# Altium PCB Final decision V3.PcbDoc (part 2 of 2)
Units mm, origin at the board's own origin, x right, y up, seen from the top; angles counter-clockwise.
Board outline 102.3 x 84 mm, 2 copper layers (Top Layer, Bottom Layer); 138 components, 123 nets, 552 pads, 289 vias.
Unrouted connection lines stored in the file: 2.
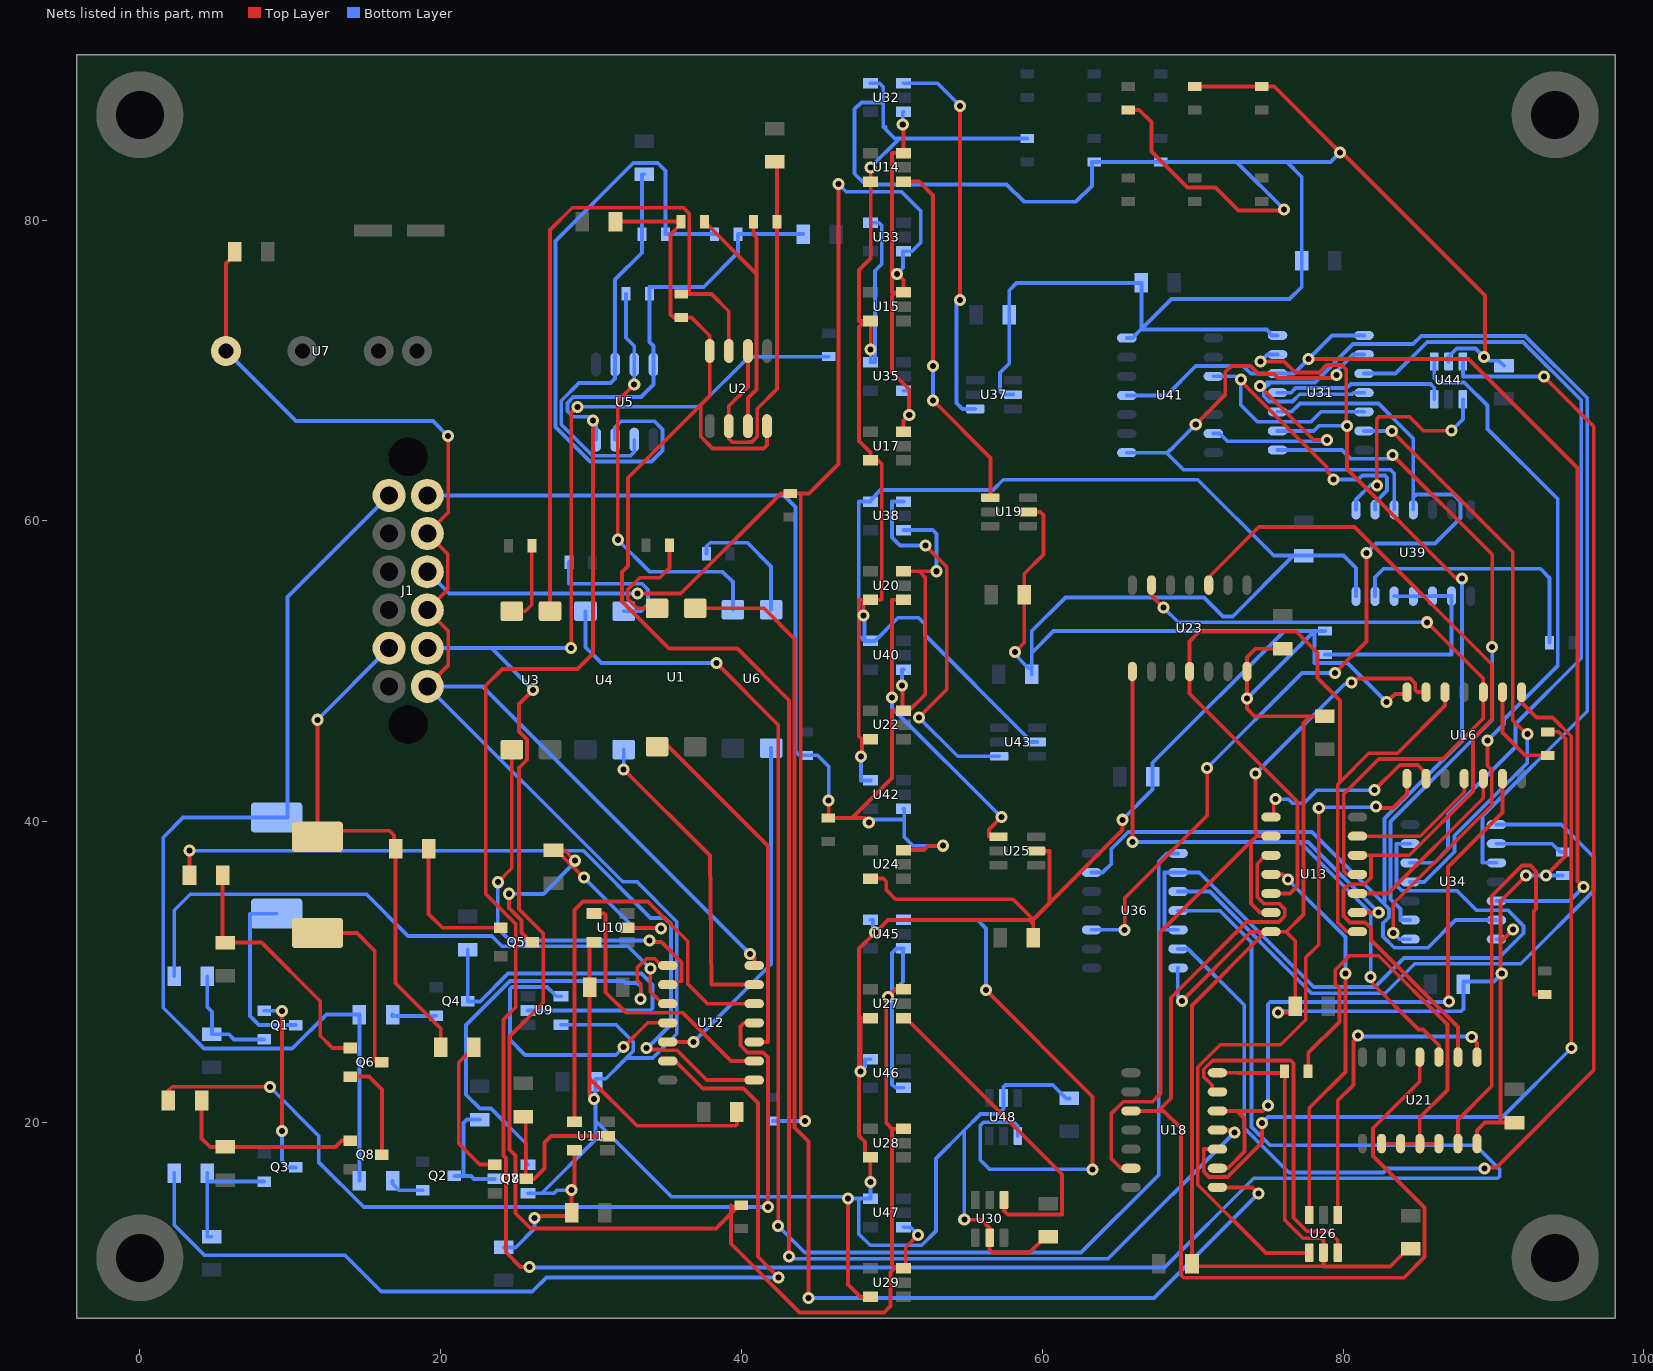
[diagram p2: the nets of this part, all layers, seen from the top]

## Via types
v1: diameter 0.8, hole 0.4, Top Layer to Bottom Layer, tented both sides, 289 vias

## Nets (pads, with @x,y where several pads share a name; then routed paths per layer and width w, separated by ;. In a path a pad name is that pad's centre, name@x,y a point inside that pad or via, vN(x,y) a via of type N, cw(c..) or ccw(c..) an arc to the next point about the centre after c; other vN are vias at no path point) (continued)
GREEN_1: U1.3 U12.10 | length 24
  Top Layer w0.254: U1.3@34.386,44.993 35.154,44.993 41.758,38.389 41.758,25.36 U12.10@40.85,25.36
GREEN_2: U4.3 U12.13 | length 20.8
  Top Layer w0.254: v1(32.17,43.485) 37.897,37.758 38.013,29.17 U12.13@40.85,29.17
  Bottom Layer w0.254: v1(32.17,43.485) U4.3@32.17,44.8
GREEN_LED_1: R22.2 U12.8 | length 52.6
  Top Layer w0.254: R22.2@3.298,36.452 v1(3.298,38.075) ; v1(33.7,24.952) 33.804,24.848 34.46,24.848 34.5,24.808 35.706,24.808 37.694,22.82 U12.8@40.85,22.82
  Bottom Layer w0.254: v1(3.298,38.075) 29.489,38.075 33.96,33.604 34.892,33.604 35.306,33.19 35.306,26.517 33.741,24.952 v1(33.7,24.952)
GREEN_LED_2: R25.2 U12.11 | length 59.3
  Top Layer w0.254: R25.2@1.901,21.466 1.901,22.123 2.155,22.377 v1(8.636,22.377) ; U12.11@40.85,26.63 40.179,26.63 39.94,26.391 39.94,25.135 40.411,24.663 41.427,24.663 41.758,24.333 v1(41.758,14.376)
  Bottom Layer w0.254: v1(8.636,22.377) 11.887,19.126 11.887,17.374 14.884,14.376 v1(41.758,14.376)
Green_On1_Reciever1: U13.4 U16.10 U23.6 | length 45.2
  Top Layer w0.254: U23.6@67.26,55.738 67.26,55.041 v1(68.047,54.254) ; U13.4@80.958,36.499 80.264,36.499 80.048,36.715 80.048,41.848 82.371,44.171 86.632,44.171 89.325,46.863 U16.10@89.325,48.617 89.325,49.53 v1(85.591,53.264)
  Bottom Layer w0.254: v1(68.047,54.254) 69.037,53.264 v1(85.591,53.264)
Green_On1_Reciever2: U31.4 U34.10 U41.6 | length 81.4
  Top Layer w0.254: v1(74.473,68.961) 78.054,65.38 v1(78.918,65.38)
  Bottom Layer w0.254: U41.6@71.374,65.809 71.806,65.809 72.315,65.3 78.838,65.3 v1(78.918,65.38) ; v1(74.473,68.961) 74.676,68.961 74.93,69.215 75.184,69.215 ; U31.4@81.395,68.527 80.696,68.527 80.596,68.428 77.115,68.428 76.633,67.945 75.082,67.945 74.727,68.301 74.727,68.758 75.184,69.215 ; U34.10@90.2,37.27 89.281,37.27 89.281,40.386 96.241,47.346 96.241,68.165 92.105,72.3 85.2,72.3 84.655,71.755 80.67,71.755 78.13,69.215 75.184,69.215
Green_On2_Reciever1: U13.1 U13.12 U16.12 U23.11 | length 60.7
  Top Layer w0.254: U13.12@75.208,35.229 76.478,35.229 76.981,35.732 76.981,41.33 69.8,48.511 U23.11@69.8,49.988 69.8,51.994 70.435,52.629 76.911,52.629 78.308,51.232 78.308,49.555 79.8,48.064 79.8,42.628 ; U13.1@80.958,32.689 80.264,32.689 79.651,33.302 79.651,42.477 79.8,42.628 ; U16.12@86.785,48.617 86.785,47.727 83.61,44.552 81.704,44.552 79.8,42.628
Green_On2_Reciever2: U31.1 U31.12 U34.12 U41.11 | length 72.9
  Top Layer w0.254: v1(77.699,70.764) 88.336,70.764 95.58,63.52 95.58,36.068 v1(95.987,35.662)
  Bottom Layer w0.254: U41.11@65.624,68.349 68.25,68.349 70.208,70.307 73.357,70.307 73.867,69.797 U31.12@75.645,69.797 76.731,69.797 v1(77.699,70.764) 79.271,72.337 U31.1@81.395,72.337 ; U34.12@90.2,34.73 95.055,34.73 v1(95.987,35.662)
Green_On3_Reciever1: U13.9 U13.13 U16.13 U18.6 | length 53.7
  Top Layer w0.254: U18.6@65.9,16.96 65.227,16.96 64.592,17.595 64.592,20.599 65.38,21.387 67.335,21.387 67.869,21.92 67.869,32.664 73.889,38.684 ; v1(74.168,43.205) 74.168,39.242 74.371,39.039 ; U13.13@75.208,33.959 74.486,33.959 73.889,34.557 73.889,38.684 ; U13.9@75.208,39.039 74.371,39.039 ; v1(80.548,49.248) 80.696,49.248 80.967,49.519 84.474,49.519 84.797,49.196 84.797,48.766 84.946,48.617 U16.13@85.515,48.617 ; 73.889,38.684 74.244,39.039 74.371,39.039
  Bottom Layer w0.254: v1(74.168,43.205) 80.106,49.143 80.443,49.143 v1(80.548,49.248)
Green_On3_Reciever2: U31.9 U31.13 U34.13 U36.6 | length 87.7
  Top Layer w0.254: v1(74.524,70.612) 76.081,70.612 76.818,69.875 78.418,69.875 78.906,70.363 79.929,70.363 80.213,70.079 80.213,66.372 v1(80.26,66.326) 80.26,63.453 87.554,56.159 v1(87.909,56.159)
  Bottom Layer w0.254: U36.6@63.282,36.627 64.008,36.627 64.592,37.211 64.592,38.202 65.716,39.326 77.94,39.326 82.753,34.513 ; v1(74.524,70.612) 74.979,71.067 U31.13@75.645,71.067 ; U31.9@75.645,65.987 78.053,65.987 78.392,66.326 v1(80.26,66.326) ; v1(87.909,56.159) 87.909,45.364 82.753,40.208 82.753,34.513 ; U34.13@90.2,33.46 87.486,33.46 85.649,31.623 83.401,31.623 82.652,32.372 82.652,33.248 83.058,33.655 83.058,34.208 82.753,34.513
GREEN_SIGNAL_Primary: U1.1 U18.8 | length 87.4
  Top Layer w0.254: U1.1@36.926,54.193 41.504,54.193 43.536,52.161 43.536,19.66 44.45,18.745 v1(44.45,8.331) ; U18.8@71.65,15.69 73.965,15.69 v1(74.371,15.284)
  Bottom Layer w0.254: v1(44.45,8.331) 67.419,8.331 v1(74.371,15.284)
GREEN_SIGNAL_Secondary: U4.1 U36.8 | length 101.2
  Top Layer w0.254: v1(38.329,50.546) 42.443,46.431 v1(42.443,13.115)
  Bottom Layer w0.254: U4.1@29.63,54 29.63,51.599 30.683,50.546 v1(38.329,50.546) ; v1(42.443,13.115) 44.208,11.35 62.572,11.35 67.742,16.519 67.742,37.363 68.275,37.897 U36.8@69.032,37.897
LED_GREEN: D2.1 J1.11 R20.2 R24.2 | length 35.3
  Top Layer w0.254: v1(11.811,46.781) 11.811,39.1 11.811,39 D2.1@11.8,39 12.2,39.4 16.6,39.4 16.9,39.1 16.9,38.3 R20.2@17,38.2 17,29.264 20,26.264 R24.2@20,25
  Bottom Layer w0.254: v1(11.811,46.781) J1.11@16.572,51.542
LED_RED: D1.1 J1.7 R13.2 R17.2 | length 70.5
  Bottom Layer w0.254: R13.2@14.601,16.132 R17.2@14.601,27.181 12.398,27.181 10.135,24.917 4.267,24.917 1.549,27.635 1.549,38.964 2.873,40.287 D1.1@9.097,40.287 9.804,40.287 9.804,54.934 J1.7@16.572,61.702
NetC1_1: C1.1 R2.2 U2.2 U2.6 | length 27.4
  Top Layer w0.254: U2.2@40.429,71.303 40.429,68.91 39.159,67.64 U2.6@39.159,66.303 39.159,65.489 39.413,65.235 40.495,65.235 40.513,65.253 40.691,65.253 41.046,65.608 41.046,67.462 42.352,68.768 R2.2@42.352,79.892 42.352,83.872 C1.1@42.207,83.872
NetC3_1: C3.1 R7.2 U5.2 U5.6 | length 26.9
  Bottom Layer w0.254: U5.6@32.87,65.4 32.87,64.592 32.616,64.338 30.091,64.338 28.016,66.413 28.016,67.996 29.187,69.167 31.298,69.167 31.6,69.469 U5.2@31.6,70.4 31.6,76.048 33.383,77.831 R7.2@33.383,79.074 33.383,83.054 C3.1@33.528,83.054
NetD1_2: D1.2 Q1.3 | length 11.9
  Bottom Layer w0.254: D1.2@9.097,33.887 7.315,33.887 7.315,27.09 7.925,26.48 Q1.3@10.367,26.48
NetD2_2: D2.2 Q6.3 | length 12.2
  Top Layer w0.254: D2.2@11.8,32.6 14.427,32.6 15.618,31.409 15.618,24.006 Q6.3@16.082,24.006
NetQ1_1: Q1.1 R12.1 R14.2 | length 7.6
  Bottom Layer w0.254: R12.1@4.482,29.721 4.482,27.686 4.801,27.367 R14.2@4.801,25.868 ; R14.2@4.779,25.868 R14.2@4.801,25.868 ; Q1.1@8.267,25.53 6.256,25.53 5.918,25.868 R14.2@4.801,25.868
NetQ1_2: Q1.2 Q3.3 | length 12.3
  Top Layer w0.254: v1(9.449,19.431) v1(9.449,27.43)
  Bottom Layer w0.254: Q1.2@8.267,27.43 v1(9.449,27.43) ; v1(9.449,19.431) 9.449,17.45 9.878,17.021 Q3.3@10.367,17.021
NetQ2_1: Q2.1 R13.1 | length 2.4
  Bottom Layer w0.254: R13.1@16.801,16.132 16.801,15.926 17.227,15.5 Q2.1@18.8,15.5
NetQ2_3: Q2.3 R11.1 U8.2 | length 7.5
  Bottom Layer w0.254: Q2.3@20.9,16.45 21.514,16.45 ; R11.1@22.6,20.2 21.742,20.2 21.514,19.971 21.514,16.45 ; U8.2@23.6,16.25 22.225,16.25 22.025,16.45 21.514,16.45
NetQ3_1: Q3.1 R16.1 R18.2 | length 8.3
  Bottom Layer w0.254: R16.1@4.482,16.64 R16.1@4.482,16.071 ; R18.2@4.779,12.406 4.482,12.406 R16.1@4.482,16.071 ; Q3.1@8.267,16.071 R16.1@4.482,16.071
NetQ4_1: Q4.1 R17.1 | length 3
  Bottom Layer w0.254: R17.1@16.801,27.181 16.801,27.076 19.585,27.076 19.609,27.1 Q4.1@19.7,27.1
NetQ4_3: Q4.3 R15.1 U9.2 | length 26.7
  Bottom Layer w0.254: R15.1@21.8,31.5 Q4.3@21.8,28.05 22.631,28.05 24.485,29.904 33.345,29.904 34.087,29.162 34.087,27.602 33.934,27.45 U9.2@25.8,27.45
NetQ5_1: Q5.1 R20.1 | length 9.5
  Top Layer w0.254: R20.1@19.2,38.2 19.2,33.867 20.117,32.95 Q5.1@24,32.95
NetQ5_3: Q5.3 R19.1 U10.2 | length 22.3
  Top Layer w0.254: v1(24.548,35.213) 24.548,34.258 25.373,33.434 25.373,32.627 26,32 Q5.3@26.1,32 ; R19.1@27.5,38.1 R19.1@27.711,38.1 ; v1(28.938,37.407) 28.245,38.1 R19.1@27.711,38.1 ; v1(29.533,36.278) R19.1@27.711,38.1 ; U10.2@32.4,32.95 34.601,32.95 v1(34.637,32.914)
  Bottom Layer w0.254: v1(24.548,35.213) 25.444,35.213 25.456,35.2 26.826,35.2 28.938,37.312 v1(28.938,37.407) ; v1(29.533,36.278) 32.897,32.914 v1(34.637,32.914)
NetQ6_1: Q6.1 R22.1 R23.2 | length 17.2
  Top Layer w0.254: R22.1@5.498,36.452 5.498,31.964 R23.2@5.668,31.964 8.092,31.964 11.989,28.067 11.989,25.769 12.802,24.956 Q6.1@13.982,24.956
NetQ6_2: Q6.2 Q8.3 | length 6.8
  Top Layer w0.254: Q6.2@13.982,23.056 15.24,23.056 16.104,22.192 16.104,17.849 Q8.3@16.082,17.849
NetQ7_1: Q7.1 R24.1 | length 9.8
  Top Layer w0.254: R24.1@22.2,25 21.2,24 21.2,18.6 22.6,17.2 Q7.1@23.6,17.2
NetQ7_3: Q7.3 R21.1 U11.2 | length 11.9
  Top Layer w0.254: R21.1@25.5,20.4 25.654,20.4 25.654,16.25 Q7.3@25.7,16.25 26.213,16.25 26.899,16.936 26.899,18.669 27.33,19.1 U11.2@31.1,19.1
NetQ8_1: Q8.1 R25.1 R26.2 | length 12.8
  Top Layer w0.254: R25.1@4.101,21.466 4.101,18.948 4.674,18.375 R26.2@5.668,18.375 13.013,18.375 13.437,18.799 Q8.1@13.982,18.799
NetR1_2: R1.2 U1.2 | length 7.7
  Top Layer w0.254: U1.2@34.386,54.193 33.056,54.193 32.436,54.813 32.436,55.431 33.232,56.227 34.571,56.227 35.214,56.871 R1.2@35.214,58.383
NetR2_1: R2.1 R4.2 U2.7 | length 18.9
  Top Layer w0.254: R4.2@37.526,79.892 37.526,79.908 41.008,76.427 ; U2.7@40.429,66.303 40.429,68.166 41.008,68.744 41.008,76.427 ; R2.1@40.792,79.892 40.792,79.045 41.008,78.83 41.008,76.427
NetR3_2: R3.2 U3.2 | length 5.4
  Top Layer w0.254: U3.2@24.73,54 25.628,54 26.06,54.432 R3.2@26.06,58.337
NetR6_2: R6.2 U4.2 | length 9.6
  Bottom Layer w0.254: R6.2@28.521,57.265 28.521,55.821 33.382,55.821 33.782,55.421 33.782,54.458 33.324,54 U4.2@32.17,54
NetR7_1: R7.1 R9.2 U5.7 | length 43.6
  Bottom Layer w0.254: U5.7@31.6,65.4 31.6,66.218 32.006,66.624 34.211,66.624 34.747,66.088 34.747,64.694 34.011,63.957 29.929,63.957 27.635,66.251 27.635,78.625 32.805,83.795 34.435,83.795 34.943,83.287 R7.1@34.943,79.074 34.943,79.07 38.209,79.07 R9.2@38.209,79.074
NetR8_2: R8.2 U6.2 | length 8.4
  Bottom Layer w0.254: R8.2@37.675,57.819 37.675,58.3 37.922,58.547 40.395,58.547 41.97,56.972 U6.2@41.97,54.1
NetR34_1: R34.1 U16.9 | length 6.3
  Top Layer w0.254: U16.9@90.595,48.617 90.595,45.929 92.104,44.42 R34.1@93.6,44.42
NetR35_2: R35.2 U21.9 U21.10 U21.11 U21.12 | length 30
  Top Layer w0.254: R35.2@77.68,23.4 77.68,24.613 79.756,26.689 79.756,28.905 79.477,29.185 79.477,30.134 80.432,31.09 82.374,31.09 86.944,26.52 86.944,22.174 85.1,20.33 U21.11@85.1,18.6 U21.11@85.1,18.593 ; U21.9@82.56,18.6 82.56,18.593 U21.10@83.83,18.593 ; U21.10@83.83,18.6 U21.10@83.83,18.593 ; U21.12@86.37,18.6 86.37,18.593 U21.11@85.1,18.593 ; U21.10@83.83,18.593 U21.11@85.1,18.593
NetR37_1: R37.1 U21.13 | length 30.3
  Top Layer w0.254: U21.13@87.64,18.6 87.64,20.168 89.891,22.418 89.891,35.07 91.905,37.084 92.456,37.084 92.837,36.703 92.837,34.214 92.685,34.061 92.685,28.52 R37.1@93.4,28.52
NetR46_1: R46.1 U34.9 | length 4.6
  Bottom Layer w0.254: U34.9@90.2,38.54 93.903,38.54 94.463,37.98 R46.1@94.6,37.98
NetR47_2: R47.2 U39.9 U39.10 U39.11 U39.12 | length 16.2
  Bottom Layer w0.254: R47.2@78.8,51.12 87.21,51.12 U39.9@87.21,55 87.21,55.016 85.94,55.016 U39.10@85.94,55 85.94,54.991 U39.11@84.67,54.991 ; U39.12@83.4,55 83.4,54.991 U39.11@84.67,54.991 ; U39.11@84.67,55 U39.11@84.67,54.991
NetR49_1: R49.1 U39.13 | length 17.6
  Bottom Layer w0.254: U39.13@82.13,55 82.13,56.259 82.691,56.82 93.116,56.82 93.72,56.216 R49.1@93.72,51.9
NetU8_4: U8.4 U12.1 | length 30
  Top Layer w0.254: v1(33.3,28.2) 33.3,29.21 33.075,29.435 33.075,30.297 33.666,30.888 34.234,30.888 34.682,30.44 U12.1@35.1,30.44
  Bottom Layer w0.254: U8.4@25.8,17.2 25.654,17.2 25.654,18.618 23.343,20.93 22.606,20.93 21.692,21.844 21.692,26.486 24.619,29.413 32.167,29.413 32.294,29.286 33.041,29.286 33.3,29.027 v1(33.3,28.2)
NetU9_4: U9.4 U12.4 | length 18.9
  Top Layer w0.254: v1(32.156,25.019) 33.767,26.63 U12.4@35.1,26.63
  Bottom Layer w0.254: U9.4@28,28.4 27.686,28.4 27.079,29.007 24.749,29.007 24.6,28.858 24.6,25.5 25.6,24.5 31.637,24.5 v1(32.156,25.019)
NetU10_4: U10.4 U12.9 | length 17.7
  Top Layer w0.254: U10.4@30.2,33.9 30.861,33.9 30.963,33.798 30.963,28.662 32.32,27.305 36.079,27.305 39.294,24.09 U12.9@40.85,24.09
NetU11_4: U11.4 U12.12 | length 30.8
  Top Layer w0.254: U11.4@28.9,20.05 28.9,34.142 29.464,34.706 33.772,34.706 36.424,32.055 36.424,29.21 37.734,27.9 U12.12@40.85,27.9
NetU13_3: U13.3 U16.5 | length 12.3
  Top Layer w0.254: U13.3@80.958,35.229 82.989,35.229 89.325,41.565 U16.5@89.325,42.867
NetU13_6: U13.6 U16.4 | length 9.2
  Top Layer w0.254: U13.6@80.958,39.039 85.133,39.039 88.055,41.961 U16.4@88.055,42.867
NetU13_8: U13.8 U16.2 | length 13.1
  Top Layer w0.254: U13.8@75.208,40.309 75.236,40.309 75.396,40.469 75.396,41.396 v1(75.5,41.5) ; v1(82.1,42.1) 83.769,43.769 84.963,43.769 85.515,43.217 U16.2@85.515,42.867
  Bottom Layer w0.254: v1(75.5,41.5) 76.378,41.5 76.654,41.224 77.384,41.224 78.26,42.1 v1(82.1,42.1)
NetU13_11: U13.11 U26.3 | length 26.2
  Top Layer w0.254: U13.11@75.208,36.499 75.997,36.499 v1(76.327,36.17) ; U26.3@77.75,13.855 77.75,20.956 80.162,23.368 v1(80.162,29.896)
  Bottom Layer w0.254: v1(76.327,36.17) 80.162,32.334 v1(80.162,29.896)
NetU14_1: U14.1 U19.1 | length 24
  Top Layer w0.254: U14.1@50.769,82.564 51.816,82.564 52.73,81.65 v1(52.73,70.307) ; v1(52.73,68.021) 56.566,64.186 56.566,61.55 U19.1@56.545,61.55
  Bottom Layer w0.254: v1(52.73,68.021) v1(52.73,70.307)
NetU16_1: U16.1 U26.4 | length 47.4
  Top Layer w0.254: U26.4@77.75,11.345 77.75,11.328 74.88,11.328 70.343,15.865 70.343,23.681 71.834,25.171 75.858,25.171 77.521,26.834 77.521,30.963 78.384,31.826 v1(78.384,40.919) ; v1(82.2,41) 82.281,40.919 83.33,40.919 84.245,41.834 U16.1@84.245,42.867
  Bottom Layer w0.254: v1(78.384,40.919) 78.425,40.96 82.16,40.96 v1(82.2,41)
NetU16_6: U16.6 U18.9 U18.12 | length 43.9
  Top Layer w0.254: U18.9@71.65,16.96 72.339,16.96 73.457,18.078 73.457,20.266 72.953,20.77 ; U18.12@71.65,20.77 72.953,20.77 ; v1(75.006,21.126) 74.651,20.77 72.953,20.77 ; v1(87.058,28.058) 86.97,28.147 86.97,36.982 90.595,40.608 U16.6@90.595,42.867
  Bottom Layer w0.254: v1(75.006,21.126) 75.006,27.867 75.155,28.016 87.016,28.016 v1(87.058,28.058)
NetU16_8: U16.8 U18.10 | length 57
  Top Layer w0.254: U18.10@71.65,18.23 70.739,18.23 70.739,16.739 71.095,16.383 72.314,16.383 74.6,18.669 v1(74.6,19.964) ; U16.8@91.865,48.617 91.865,47.93 92.855,46.939 93.922,46.939 95.174,45.688 v1(95.174,24.943)
  Bottom Layer w0.254: v1(74.6,19.964) 75.006,20.371 90.602,20.371 v1(95.174,24.943)
NetU18_13: U18.13 U26.6 | length 23
  Top Layer w0.254: U18.13@71.65,22.04 71.298,22.04 71.298,22.479 70.741,23.036 70.741,23.539 71.332,24.13 76.517,24.13 76.708,23.939 76.708,13.665 77.597,12.776 79.045,12.776 79.65,12.171 U26.6@79.65,11.345
NetU20_1: U20.1 U25.1 | length 20.5
  Top Layer w0.254: v1(50.013,48.26) 50.013,54.756 U20.1@50.769,54.756 ; U25.1@57.09,39 56.453,39 56.453,39.486 v1(57.277,40.31)
  Bottom Layer w0.254: v1(50.013,48.26) 50.013,47.574 v1(57.277,40.31)
NetU21_1: U21.1 U26.1 | length 21.6
  Top Layer w0.254: U26.1@79.65,13.855 79.65,21.459 80.696,22.504 80.696,25.378 81,25.682 v1(81,25.8) ; v1(88.556,25.693) 88.556,25.646 88.91,25.292 U21.1@88.91,24.35
  Bottom Layer w0.254: v1(81,25.8) 81.086,25.714 88.535,25.714 v1(88.556,25.693)
NetU27_1: U27.1 U30.1 | length 22.2
  Top Layer w0.254: U27.1@50.769,26.947 50.927,26.947 61.316,16.559 61.316,13.894 57.709,13.894 57.45,14.153 U30.1@57.45,14.855
NetU31_3: U31.3 U34.5 | length 53.3
  Bottom Layer w0.254: U31.3@81.395,69.797 83.49,69.797 85.593,71.9 91.966,71.9 95.834,68.032 95.834,50.87 91.459,46.494 91.459,44.959 86.978,40.478 86.978,38.176 86.072,37.27 U34.5@84.45,37.27
NetU31_6: U31.6 U34.4 | length 39.4
  Top Layer w0.254: v1(83.238,65.987) 91.288,57.937 91.288,46.736 92.176,45.848 v1(92.252,45.848)
  Bottom Layer w0.254: U31.6@81.395,65.987 v1(83.238,65.987) ; U34.4@84.45,36 85.4,36 87.4,38 87.4,39.065 92.252,43.918 v1(92.252,45.848)
NetU31_8: U31.8 U34.2 | length 45.4
  Top Layer w0.254: v1(83.287,64.389) 89.916,57.76 v1(89.916,51.613)
  Bottom Layer w0.254: U31.8@75.645,64.717 79.936,64.717 80.518,64.135 83.033,64.135 v1(83.287,64.389) ; U34.2@84.45,33.46 83.82,33.46 83.82,34.188 83.16,34.849 83.16,40.005 89.916,46.761 v1(89.916,51.613)
NetU31_11: U31.11 U44.3 | length 11.5
  Bottom Layer w0.254: U31.11@75.645,68.527 76.532,68.527 76.839,68.834 80.239,68.834 80.518,69.113 85.813,69.113 86.067,68.859 U44.3@86.067,68.095
NetU32_1: U32.1 U37.1 | length 25.6
  Top Layer w0.254: v1(54.534,74.676) v1(54.534,87.605)
  Bottom Layer w0.254: U32.1@50.769,89.099 53.039,89.099 v1(54.534,87.605) ; v1(54.534,74.676) 54.305,74.447 54.305,67.831 54.686,67.45 U37.1@55.545,67.45
NetU34_1: U34.1 U44.4 | length 48.5
  Top Layer w0.254: v1(83.337,32.614) 83.337,34.544 89.891,41.097 89.891,43.432 89.6,43.723 v1(89.6,45.4)
  Bottom Layer w0.254: v1(83.337,32.614) 83.761,32.19 U34.1@84.45,32.19 ; U44.4@86.067,70.605 86.067,69.494 86.346,69.215 88.062,69.215 89.611,67.666 89.611,66.116 94.28,61.448 94.28,50.387 90.701,46.808 90.701,46.501 v1(89.6,45.4)
NetU34_6: U34.6 U36.9 U36.12 | length 46.9
  Bottom Layer w0.254: U36.12@69.032,32.817 68.146,32.817 68.123,32.84 68.123,36.627 U36.9@69.032,36.627 70.434,36.627 78.054,29.007 82.114,29.007 84.045,30.937 90.348,30.937 91.999,32.588 91.999,33.079 90.966,34.112 88.875,34.112 87.579,35.408 83.912,35.408 83.548,35.771 83.548,38.54 U34.6@84.45,38.54
NetU34_8: U34.8 U36.10 | length 42.8
  Bottom Layer w0.254: U36.10@69.032,35.357 71.143,35.357 77.9,28.6 82.808,28.6 84.762,30.554 91.81,30.554 96.643,35.387 96.643,37.673 94.505,39.81 U34.8@90.2,39.81
NetU36_13: U36.13 U44.6 | length 95.3
  Top Layer w0.254: v1(89.414,16.952) 89.48,17.018 90.195,17.018 96.672,23.495 96.672,66.269 v1(93.345,69.596)
  Bottom Layer w0.254: U36.13@69.032,31.547 69.698,31.547 73.431,27.813 73.431,19.634 76.387,16.679 82.69,16.679 82.963,16.952 v1(89.414,16.952) ; U44.6@87.967,70.605 87.967,69.596 v1(93.345,69.596)
NetU38_1: U38.1 U43.1 | length 24.8
  Top Layer w0.254: v1(51.791,46.939) 53.645,48.793 53.645,56.947 v1(52.222,58.369)
  Bottom Layer w0.254: U38.1@50.769,61.29 50.013,61.29 50.013,58.903 50.546,58.369 v1(52.222,58.369) ; v1(51.791,46.939) 54.38,44.35 U43.1@57.145,44.35
NetU39_1: U39.1 U44.1 | length 14.7
  Top Layer w0.254: v1(82.266,62.369) 82.245,62.39 82.245,66.78 82.394,66.929 84.409,66.929 85.338,66 v1(87.2,66)
  Bottom Layer w0.254: U39.1@80.86,60.75 80.86,61.429 81.839,62.408 82.227,62.408 v1(82.266,62.369) ; v1(87.2,66) 87.967,66.767 U44.1@87.967,68.095
NetU45_1: U45.1 U48.1 | length 38
  Top Layer w0.254: v1(56.261,28.804) 63.348,21.717 v1(63.348,16.891)
  Bottom Layer w0.254: U45.1@50.769,33.482 55.672,33.482 56.261,32.893 v1(56.261,28.804) ; U48.1@58.372,19.112 58.372,19.784 58.141,20.015 56.083,20.015 55.88,19.812 55.88,17.505 56.494,16.891 v1(63.348,16.891)
RED_1: U3.3 U12.2 | length 27.6
  Top Layer w0.254: v1(23.8,35.978) 24.73,36.908 U3.3@24.73,44.8 ; v1(33.9,32.1) 34.004,31.996 34.679,31.996 36.015,30.66 36.015,29.421 U12.2@35.1,29.17
  Bottom Layer w0.254: v1(23.8,35.978) 23.8,32.9 24.6,32.1 v1(33.9,32.1)
RED_2: U6.3 U12.5 | length 23.4
  Top Layer w0.254: U12.5@35.1,25.36 v1(36.805,25.36)
  Bottom Layer w0.254: v1(36.805,25.36) 41.97,30.525 U6.3@41.97,44.9
RED_Final_Primary: C2.2 R4.1 R5.1 U2.4 U2.8 U18.11 | length 127.4
  Top Layer w0.254: C2.2@31.623,79.892 31.623,79.908 35.966,79.908 R4.1@35.966,79.892 35.966,79.731 35.281,79.045 35.281,73.736 35.497,73.52 R5.1@36,73.52 36.683,73.52 37.889,72.314 U2.4@37.889,71.303 37.889,70.249 37.889,68.301 37.287,67.699 ; U2.8@41.699,66.303 41.699,65.043 41.477,64.821 38.075,64.821 37.287,65.609 37.287,67.699 ; v1(43.155,11.1) 43.155,48.082 39.726,51.511 35.191,51.511 32.055,54.648 32.055,56.596 32.461,57.002 32.461,62.873 37.287,67.699 ; U18.11@71.65,19.5 72.612,19.5 v1(72.771,19.341)
  Bottom Layer w0.254: v1(43.155,11.1) 43.307,10.947 64.378,10.947 v1(72.771,19.341)
RED_Final_Secondary: C4.2 R9.1 R10.1 U5.4 U5.8 U36.11 | length 197
  Top Layer w0.254: v1(25.9,10.4) 25.896,10.404 25.308,10.404 24.333,11.379 24.333,17.653 24.181,17.805 24.181,26.848 24.994,27.661 24.994,33.206 23,35.2 23,49.06 24.105,50.165 29.108,50.165 30.124,51.181 v1(30.124,66.675)
  Bottom Layer w0.254: v1(25.9,10.4) 25.937,10.363 68.123,10.363 74.06,16.3 90.275,16.3 90.424,16.449 90.424,16.864 88.797,18.491 75.133,18.491 73.914,19.71 73.914,31.986 71.813,34.087 U36.11@69.032,34.087 ; v1(30.124,66.675) 30.33,66.469 v1@30.33,66.454 ; U5.8@30.33,65.4 v1@30.33,66.454 ; R9.1@39.769,79.074 R9.1@39.769,79.07 ; C4.2@44.112,79.074 44.112,79.07 R9.1@39.769,79.07 ; v1@30.33,66.454 29.855,66.929 28.804,66.929 28.423,67.31 28.423,67.854 28.818,68.25 33.327,68.25 34.14,69.063 U5.4@34.14,70.4 34.14,71.628 33.88,71.888 R10.1@33.88,75.1 33.88,75.565 37.49,75.565 39.769,77.844 R9.1@39.769,79.07
RED_LED_1: R12.2 U12.3 | length 41.6
  Top Layer w0.254: v1(33.936,30.236) 33.936,28.714 34.75,27.9 U12.3@35.1,27.9
  Bottom Layer w0.254: R12.2@2.282,29.721 2.282,34.112 3.349,35.179 15.062,35.179 17.831,32.41 23.393,32.41 24.083,31.721 32.45,31.721 v1(33.936,30.236)
RED_LED_2: R16.2 U12.6 | length 65.2
  Top Layer w0.254: U12.6@35.1,24.09 35.6,24.09 37.422,22.268 40.14,22.268 41.097,21.311 41.097,11.074 v1(42.469,9.703)
  Bottom Layer w0.254: R16.2@2.282,16.64 2.282,13.187 4.293,11.176 13.64,11.176 16.053,8.763 26.086,8.763 27.026,9.703 v1(42.469,9.703)
Red_On1_Reciever1: U13.5 U21.2 U23.3 | length 61.4
  Top Layer w0.254: U23.3@71.07,55.738 71.07,56.261 74.397,59.588 80.772,59.588 89.891,50.47 89.891,46.791 88.646,45.546 88.646,42.011 84.404,37.769 81.864,37.769 ; U13.5@80.958,37.769 81.864,37.769 ; U21.2@87.64,24.35 87.64,26.36 81.86,32.14 81.86,32.918 81.478,33.3 80.471,33.3 80.03,33.741 80.03,35.453 80.416,35.839 81.432,35.839 81.864,36.271 81.864,37.769
Red_On1_Reciever2: U31.5 U39.2 U41.3 | length 27.9
  Top Layer w0.254: v1(73.2,69.4) 73.2,69.312 78.915,63.597 78.915,63.331 79.35,62.896 v1(79.35,62.748)
  Bottom Layer w0.254: U41.3@71.374,69.619 72.833,69.619 73.052,69.4 v1(73.2,69.4) 73.2,67.7 74.3,66.6 77.871,66.6 78.528,67.257 U31.5@81.395,67.257 ; v1(79.35,62.748) 81.003,62.748 81.276,63.021 82.782,63.021 82.931,62.872 82.931,62.015 82.13,61.214 U39.2@82.13,60.75
Red_On2_Reciever1: U13.2 U21.3 U23.8 | length 49.4
  Top Layer w0.254: v1(65.99,38.658) U23.8@65.99,49.988 ; U13.2@80.958,33.959 v1(82.372,33.96) ; v1(81.839,29.667) 81.839,29.365 85.014,26.19 85.316,26.19 86.37,25.136 U21.3@86.37,24.35
  Bottom Layer w0.254: v1(65.99,38.658) 77.115,38.658 ; v1(81.839,29.667) 81.839,33.934 77.115,38.658 ; v1(82.372,33.96) 77.674,38.658 77.115,38.658
Red_On2_Reciever2: U31.2 U39.3 U41.8 | length 38.2
  Top Layer w0.254: v1(70.206,66.421) 72.161,68.377 72.161,69.888 72.581,70.307 73.841,70.307 74.372,69.777 75.402,69.777 75.684,69.494 79.35,69.494 v1(79.553,69.698)
  Bottom Layer w0.254: U41.8@65.624,64.539 68.261,64.539 69.4,63.4 83.158,63.4 83.4,63.158 U39.3@83.4,60.75 ; 68.366,64.576 68.683,64.892 68.683,64.898 v1(70.206,66.421) ; v1(79.553,69.698) 79.553,69.949 80.67,71.067 U31.2@81.395,71.067
Red_On3_Reciever1: U13.10 U18.3 U21.4 | length 70.1
  Top Layer w0.254: U18.3@65.9,20.77 67.709,20.77 ; U13.10@75.208,37.769 74.854,37.769 74.293,37.208 74.293,35.004 74.752,34.544 75.768,34.544 76.117,34.195 76.117,33.713 75.729,33.325 73.584,33.325 68.553,28.294 68.553,21.614 67.709,20.77 ; U21.4@85.1,24.35 85.1,22.733 81.991,19.624 81.991,17.78 85.42,14.351 85.42,11.049 84.048,9.677 69.411,9.677 69.215,9.874 69.215,19.627 68.072,20.77 67.709,20.77
Red_On3_Reciever2: U31.10 U36.3 U39.4 | length 61.9
  Top Layer w0.254: v1(65.481,32.817) 65.481,34.925 70.968,40.411 v1(70.968,43.586) ; v1(79.451,49.886) 81.559,51.994 v1(81.559,57.861)
  Bottom Layer w0.254: U36.3@63.282,32.817 v1(65.481,32.817) ; v1(70.968,43.586) 77.267,49.886 v1(79.451,49.886) ; U31.10@75.645,67.257 76.579,67.257 77.14,67.818 82.345,67.818 84.67,65.493 84.67,61.544 ; v1(81.559,57.861) 82.198,58.5 86.11,58.5 87.808,60.198 87.808,61.29 87.339,61.759 84.885,61.759 84.67,61.544 ; U39.4@84.67,60.75 84.67,61.544
RED_SIGNAL_Primary: R5.2 U2.3 U3.1 | length 47
  Top Layer w0.254: U3.1@27.27,54 27.27,79.34 28.753,80.823 36.142,80.823 36.525,80.439 36.525,75.08 ; R5.2@36,75.08 36.525,75.08 ; U2.3@39.159,71.303 39.159,73.939 38.018,75.08 36.525,75.08
RED_SIGNAL_Secondary: R10.2 U5.3 U6.1 | length 27.7
  Top Layer w0.254: v1(31.775,58.75) 31.775,67.968 v1(32.87,69.063)
  Bottom Layer w0.254: v1(31.775,58.75) 33.909,56.617 38.744,56.617 39.43,55.931 U6.1@39.43,54.1 ; R10.2@32.32,75.1 32.32,72.178 32.87,71.628 U5.3@32.87,70.4 v1(32.87,69.063)
Sgn_In1_Primary: J1.3 R33.2 R45.2 U14.3 U15.3 U17.3 U32.3 U33.3 U35.3 | length 132.4
  Top Layer w0.254: v1(33.096,55.169) 35.966,55.169 42.628,61.83 R33.2@43.239,61.83 43.942,61.83 ; v1(44.221,20.096) 43.942,20.375 43.942,61.83 ; v1(46.457,82.398) 46.457,63.786 44.501,61.83 43.942,61.83 ; v1(50.343,76.429) 50.769,76.002 U15.3@50.769,75.195 50.252,75.195 50.132,75.075 ; v1(50.724,86.36) 50.775,86.309 50.775,84.464 U14.3@50.769,84.464 50.013,84.464 50.013,75.195 50.132,75.075 ; U17.3@50.769,65.925 50.769,66.669 v1(51.156,67.056) 51.156,68.732 50,69.888 50,74.943 50.132,75.075
  Bottom Layer w0.254: J1.3@19.112,56.622 20.565,55.169 v1(33.096,55.169) ; R45.2@42.076,20.096 v1(44.221,20.096) ; v1(46.457,82.398) 46.965,81.89 50.646,81.89 51.916,80.62 51.916,78.511 51.334,77.929 U33.3@50.769,77.929 50.749,77.929 50.749,76.835 v1(50.343,76.429) ; v1(50.724,86.36) 50.724,87.199 U32.3@50.769,87.199 ; U35.3@50.769,68.66 51.156,68.66 v1(51.156,67.056)
Sgn_In2_Primary: J1.1 R36.2 R48.2 U20.3 U22.3 U24.3 U38.3 U40.3 U42.3 | length 88.9
  Top Layer w0.254: R36.2@45.779,40.24 47.348,40.24 ; R36.2@45.8,40.24 v1(45.8,41.4) ; v1(48.463,39.954) 48.177,40.24 47.348,40.24 ; v1(50.673,49.073) 50.698,49.047 U22.3@50.698,47.386 ; U24.3@50.769,38.117 52.146,38.117 52.409,38.379 53.365,38.379 v1(53.391,38.405) ; U20.3@50.769,56.656 51.816,56.656 ; v1(52.978,56.656) 51.816,56.656 ; 47.348,40.24 50.013,42.905 50.013,47.386 U22.3@50.698,47.386 ; U22.3@50.698,47.386 U22.3@50.769,47.386 51.141,47.386 52.222,48.468 52.222,56.249 51.816,56.656
  Bottom Layer w0.254: J1.1@19.112,61.702 42.819,61.702 43.586,60.935 43.586,44.679 43.845,44.42 R48.2@44.3,44.42 45.064,44.42 45.8,43.684 v1(45.8,41.4) ; v1(48.463,39.954) 48.666,40.157 50.825,40.157 ; v1(50.673,49.073) 50.673,50.121 U40.3@50.769,50.121 ; U42.3@50.769,40.851 50.825,40.851 50.825,40.157 ; U38.3@50.769,59.39 52.714,59.39 52.978,59.127 v1(52.978,56.656) ; v1(53.391,38.405) 51.41,38.405 50.825,38.989 50.825,40.157
Sgn_In3_Primary: J1.5 R38.2 R50.2 U27.3 U28.3 U29.3 U45.3 U46.3 U47.3 | length 158.5
  Top Layer w0.254: v1(26.142,48.768) 25.2,47.826 25.2,46.01 25.732,45.478 25.732,44.122 25.2,43.59 25.2,34.185 26.822,32.563 26.822,27.965 24.581,25.724 24.581,18.193 24.968,17.805 24.968,13.97 25.984,12.954 38.307,12.954 39.294,13.941 ; v1(28.677,51.542) 28.677,67.183 v1(29.083,67.589) ; R38.2@40,14.5 39.853,14.5 R38.2@39.573,14.221 ; U28.3@50.769,19.578 50.013,19.578 ; U27.3@50.769,28.847 50.234,28.847 v1(49.733,28.346) 49.632,28.245 49.632,19.959 50.013,19.578 ; v1(51.74,12.522) 50.927,11.709 50.927,10.308 U29.3@50.769,10.308 50.245,10.308 ; 39.294,13.941 39.294,11.939 43.853,7.379 49.497,7.379 49.911,7.794 49.911,10.029 50.19,10.308 50.245,10.308 ; 39.294,13.941 39.294,14.5 R38.2@39.573,14.221 ; 39.294,13.941 R38.2@39.573,14.221 ; 50.013,19.578 50.013,10.541 50.245,10.308
  Bottom Layer w0.254: J1.5@19.112,51.542 23.368,51.542 ; v1(26.142,48.768) 23.368,51.542 ; v1(28.677,51.542) 23.368,51.542 ; v1(29.083,67.589) 37.16,67.589 40.491,70.92 R50.2@45.8,70.92 ; v1(49.733,28.346) v1@50.014,28.628 ; U47.3@50.769,13.043 51.219,13.043 v1(51.74,12.522) ; U46.3@50.769,22.312 50.23,22.312 50.014,22.528 v1@50.014,28.628 ; U45.3@50.769,31.582 U45.3@50.749,31.582 ; v1@50.014,28.628 50.014,31.279 50.317,31.582 U45.3@50.749,31.582 ; v1@50.014,28.628 50.749,29.362 U45.3@50.749,31.582
Sgn_Out1_Primary: C6.2 C7.1 C8.1 C9.1 C10.1 C11.2 C12.2 C13.2 C14.2 C15.2 C16.2 C17.2 C18.2 C19.2 C20.2 C21.2 C22.2 C23.2 C24.2 C25.2 C26.2 C27.2 C28.2 C29.2 J1.2 J1.4 J1.6 R27.1 R28.2 R29.2 R34.2 R35.1 R39.1 R40.2 R41.2 R46.2 R47.1 U7.6 U8.5 U9.5 U10.5 U11.5 U12.14 U13.14 U14.5 U15.5 U16.14 U17.5 U18.14 U19.5 U20.5 U21.14 U22.5 U23.14 U24.5 U25.5 U26.5 U27.5 U28.5 U29.5 U30.5 U31.14 U32.5 U33.5 U34.14 U35.5 U36.14 U37.5 U38.5 U39.14 U40.5 U41.14 U42.5 U43.5 U44.5 U45.5 U46.5 U47.5 U48.5 | length 831
  Top Layer w0.254: U7.6@5.72,71.3 5.72,77.119 6.3,77.699 C6.2@6.3,77.9 ; J1.6@19.112,49.002 20.498,50.388 20.498,52.696 J1.4@19.112,54.082 20.472,55.442 20.472,57.802 J1.2@19.112,59.162 20.498,60.548 v1(20.498,65.634) ; v1(26.238,13.64) 26.391,13.792 28.7,13.792 C9.1@28.7,14 28.7,15.648 28.9,15.848 U11.5@28.9,18.15 ; v1(30.201,21.565) 29.9,21.865 29.9,22.932 ; U10.5@30.2,32 30.048,32 29.9,31.852 C10.1@29.9,29 29.9,22.932 ; C11.2@39.7,20.7 39.7,19.863 39.624,19.787 33.045,19.787 29.9,22.932 ; v1(40.564,31.217) 40.869,30.912 40.869,30.44 U12.14@40.85,30.44 ; v1(47.092,14.943) 47.092,9.22 47.904,8.408 U29.5@48.569,8.408 ; v1(47.904,23.393) 47.904,26.947 ; v1(47.955,44.348) 48.006,44.399 48.011,45.486 ; v1(48.108,53.721) U20.5@48.108,54.756 ; v1(48.565,16.053) U28.5@48.565,17.678 ; U28.5@48.569,17.678 U28.5@48.565,17.678 ; U27.5@48.569,26.947 47.904,26.947 ; U24.5@48.569,36.217 49.428,36.217 49.632,36.013 49.632,35.455 50.237,34.849 58.054,34.849 59.387,33.515 ; U22.5@48.569,45.486 48.011,45.486 ; U17.5@48.569,64.025 U17.5@48.59,64.025 ; U14.5@48.569,82.564 U14.5@48.59,82.564 ; v1(48.59,71.399) 48.59,73.295 U15.5@48.569,73.295 U15.5@48.209,73.295 ; v1(48.59,83.515) U14.5@48.59,82.564 ; v1(54.813,13.538) 55.941,13.538 56.5,12.979 U30.5@56.5,12.345 56.5,11.557 56.703,11.354 59.152,11.354 60.198,12.4 C20.2@60.4,12.4 ; v1(58.2,51.3) 58.8,51.9 58.8,56.489 60.077,57.766 60.077,60.384 59.862,60.6 U19.5@59.055,60.6 ; C17.2@59.4,32.3 59.4,33.208 ; U25.5@59.6,38.05 60.477,38.05 60.477,34.605 ; v1(65.329,40.132) 65.329,39.457 60.477,34.605 ; R27.1@65.707,87.33 66.446,87.33 67.259,86.517 67.259,84.557 69.647,82.169 71.526,82.169 73.05,80.645 75.997,80.645 v1(76.073,80.721) ; v1(69.291,28.092) 73.888,32.689 U13.14@74.854,32.689 ; R28.2@70.152,88.89 R29.2@74.597,88.89 75.423,88.89 v1(79.807,84.506) ; U18.14@71.65,23.31 73.007,23.31 73.025,23.292 R35.1@76.12,23.292 ; v1(75.667,27.305) 76.818,27.305 C12.2@76.818,27.736 76.818,32.08 76.209,32.689 ; C14.2@76,51.5 74.168,51.5 73.61,50.942 U23.14@73.61,49.988 v1(73.61,48.184) 73.61,47.523 74.118,47.015 77.826,47.015 ; R35.1@76.12,23.4 R35.1@76.12,23.292 ; C13.2@78.784,47.015 77.826,47.015 ; v1@79.858,84.557 89.433,74.981 89.433,70.96 v1(89.374,70.9) ; v1(82.88,47.965) 82.913,47.965 83.449,48.501 84.129,48.501 U16.14@84.245,48.617 ; C19.2@84.5,11.6 84.303,11.6 83.142,10.439 ; U21.14@88.91,18.6 88.91,19.482 89.428,20 90.475,20 ; v1(90.551,29.896) v1@90.475,29.82 ; v1(91.313,32.842) 90.475,32.004 ; C16.2@91.4,20 90.475,20 ; v1(92.177,36.42) 90.475,34.718 90.475,32.004 ; v1(93.497,36.42) 94.793,37.715 94.793,45.517 94.33,45.98 R34.2@93.6,45.98 ; 47.817,26.947 47.817,19.114 48.209,18.722 48.209,17.678 U28.5@48.565,17.678 ; 47.817,26.947 47.904,26.947 ; 47.817,26.947 47.817,31.561 v1(48.895,32.639) 49.733,33.477 59.131,33.477 59.4,33.208 ; 48.011,45.486 47.803,45.695 47.803,54.756 U20.5@48.108,54.756 ; U20.5@48.108,54.756 U20.5@48.569,54.756 49.327,54.756 49.327,63.779 49.081,64.025 U17.5@48.59,64.025 ; U15.5@48.209,73.295 47.817,73.295 47.817,76.686 48.59,77.46 U14.5@48.59,82.564 ; U15.5@48.209,73.295 47.814,72.9 47.814,65.326 48.59,64.55 U17.5@48.59,64.025 ; 59.387,33.515 60.477,34.605 ; 59.387,33.515 59.4,33.503 ; 59.4,33.208 59.4,33.477 ; 59.4,33.477 59.4,33.503 ; 59.4,33.477 59.413,33.49 ; 59.4,33.503 59.413,33.49 ; 59.413,33.49 60.477,34.555 60.477,34.605 ; U13.14@74.854,32.689 U13.14@75.208,32.689 76.209,32.689 ; U13.14@74.854,32.689 69.956,27.791 C18.2@69.956,10.61 69.956,10.439 78.7,10.439 ; R35.1@76.12,23.292 76.12,13.517 77.326,12.311 78.556,12.311 78.7,12.167 U26.5@78.7,11.345 78.7,10.439 ; 76.209,32.689 76.225,32.689 77.368,33.833 77.368,46.558 77.826,47.015 ; 78.7,10.439 83.142,10.439 ; 78.7,10.439 78.725,10.414 83.117,10.414 83.142,10.439 ; 90.475,20 v1@90.475,29.82 ; v1@90.475,29.82 90.475,32.004
  Bottom Layer w0.254: U7.6@5.72,71.3 10.37,66.65 19.482,66.65 v1(20.498,65.634) ; C7.1@24.2,11.7 24.994,11.7 26.238,12.945 v1(26.238,13.64) ; U8.5@25.8,15.3 26.721,15.3 ; U9.5@28,26.5 31.666,26.5 32.808,25.358 32.808,24.749 32.359,24.3 ; v1(28.7,15.5) 27.737,15.5 27.537,15.3 26.721,15.3 ; v1(30.201,21.565) v1@30.3,21.664 ; v1(40.564,31.217) 22.778,49.002 J1.6@19.112,49.002 32.105,36.009 33.045,36.009 35.7,33.354 35.7,25.9 34.1,24.3 32.359,24.3 ; v1(47.904,23.393) 48.209,23.698 48.209,24.212 U46.5@48.569,24.212 ; v1(47.955,44.348) 47.955,42.751 U42.5@48.569,42.751 ; v1(48.108,53.721) 48.184,53.645 U40.5@48.184,52.021 ; v1(48.565,16.053) 48.569,16.049 U47.5@48.569,14.943 47.803,14.943 ; U45.5@48.569,33.482 48.743,33.482 48.743,32.791 v1(48.895,32.639) ; U35.5@48.569,70.56 U35.5@48.59,70.56 ; U33.5@48.569,79.829 49.149,79.829 49.327,79.652 49.327,77.081 48.878,76.632 48.878,70.56 U35.5@48.59,70.56 ; U32.5@48.569,89.099 49.174,89.099 49.428,88.845 49.428,87.833 ; v1(48.59,71.399) U35.5@48.59,70.56 ; v1(48.59,83.515) 50.508,85.433 ; v1(54.813,13.538) 54.813,19.489 ; U37.5@58.055,68.4 57.432,68.4 57.198,68.634 57.198,69.858 57.8,70.46 C24.2@57.8,73.7 57.8,75.326 58.293,75.819 C23.2@66.591,75.819 ; v1(58.2,51.3) 58.2,51.152 58.398,50.954 58.398,50.902 58.86,50.44 59.1,50.2 C26.2@59.3,50.2 ; R39.1@59.002,85.433 50.508,85.433 ; C26.2@59.3,49.8 C26.2@59.3,50.2 ; U43.5@59.655,45.3 58.928,45.3 58.928,45.681 52.197,52.412 52.197,53.145 51.773,53.569 50.417,53.569 48.87,52.021 U40.5@48.569,52.021 U40.5@48.184,52.021 ; C29.2@61.801,21.609 61.595,21.609 60.7,22.504 57.556,22.504 57.422,22.37 U48.5@57.422,21.622 57.422,20.904 57.092,20.574 55.898,20.574 54.813,19.489 ; v1(65.329,40.132) 67.338,42.141 C27.2@67.338,42.977 67.338,43.919 76.099,52.68 ; U41.14@65.624,72.159 65.989,72.159 66.55,72.72 ; C23.2@66.591,75.842 C23.2@66.591,75.819 ; U36.14@69.032,30.277 69.012,30.277 69.012,28.372 v1(69.291,28.092) ; v1(73.61,48.184) 78.106,52.68 ; U31.14@75.645,72.337 75.286,72.337 74.902,72.72 66.591,72.72 ; v1(75.667,27.305) 75.762,27.4 87.851,27.4 88,27.549 88,29.388 90.043,29.388 v1(90.551,29.896) ; v1(76.073,80.721) 72.921,83.873 ; R47.1@78.8,52.68 78.106,52.68 ; v1(79.807,84.506) 79.174,83.873 76.262,83.873 ; U39.14@80.86,55 80.86,56.871 80.031,57.7 C25.2@77.4,57.7 76.708,57.7 ; v1(82.88,47.965) 80.299,50.546 78.08,50.546 78.106,52.68 ; U44.5@87.017,70.605 87.017,70.92 87.559,71.462 88.812,71.462 v1(89.374,70.9) 89.522,70.9 89.776,70.646 90.377,70.646 C28.2@90.7,70.323 ; U34.14@90.2,32.19 90.661,32.19 v1(91.313,32.842) ; v1(92.177,36.42) v1(93.497,36.42) R46.2@94.6,36.42 ; 26.721,15.3 30.3,18.879 30.3,20.117 ; 30.3,20.117 v1@30.3,21.664 ; 30.3,20.117 35.355,15.062 46.972,15.062 v1(47.092,14.943) 47.803,14.943 ; v1@30.3,21.664 C8.1@30.3,22.7 30.3,22.911 30.976,22.911 31.713,23.647 31.713,23.653 32.359,24.3 ; 47.803,14.943 47.803,12.597 48.563,11.836 51.986,11.836 52.934,12.784 52.934,17.61 54.813,19.489 ; U40.5@48.184,52.021 47.803,52.402 47.803,61.29 U38.5@48.569,61.29 48.569,61.371 49.251,62.052 56.718,62.052 57.41,62.744 70.343,62.744 75.387,57.7 76.708,57.7 ; 49.428,87.833 49.428,86.195 49.581,86.195 49.581,86.043 50.19,85.433 50.508,85.433 ; 49.428,87.833 47.976,87.833 47.523,87.381 47.523,83.09 48.241,82.372 57.633,82.372 58.776,81.229 62.253,81.229 63.297,82.273 63.297,83.873 R40.2@63.447,83.873 R41.2@67.892,83.873 72.921,83.873 ; C26.2@59.3,50.2 59.3,51.223 ; 59.3,51.223 59.3,52.68 61.535,54.915 70.764,54.915 72.024,53.656 72.664,53.656 76.708,57.7 ; 59.3,51.223 60.757,52.68 76.099,52.68 ; 66.55,72.72 66.591,72.72 ; 66.55,72.72 66.591,72.761 ; 66.591,72.72 66.591,72.761 ; 66.591,72.761 68.582,74.752 76.442,74.752 77.255,75.565 C21.2@77.255,77.29 77.255,82.88 76.262,83.873 ; 66.591,72.761 C23.2@66.591,75.819 ; 72.921,83.873 76.262,83.873 ; 76.099,52.68 78.106,52.68
pads on no net: J1.8 J1.10 J1.A U2.5 U5.5 U8.1 U9.1 U10.1 U11.1 U16.3 U16.11 U21.6 U21.8 U34.3 U34.11 U39.6 U39.8

## Polygon pours and split planes (outlines as drawn)
GND on Bottom Layer "GND_L02_P002" (solid, remove dead copper, pour order 2): -4,7 -4,91 98.1,91 98.1,7
GND on Top Layer "GND_L01_P003" (solid, remove dead copper, pour order 3): -4,7 -4,91 98.1,91 98.1,7

## Silkscreen, mask and mechanical layers (free items; w line width, h text height)
Mechanical 1:
  the board outline again, w0.1